# EAGLE board current_sense (EAGLE 9.6.2)
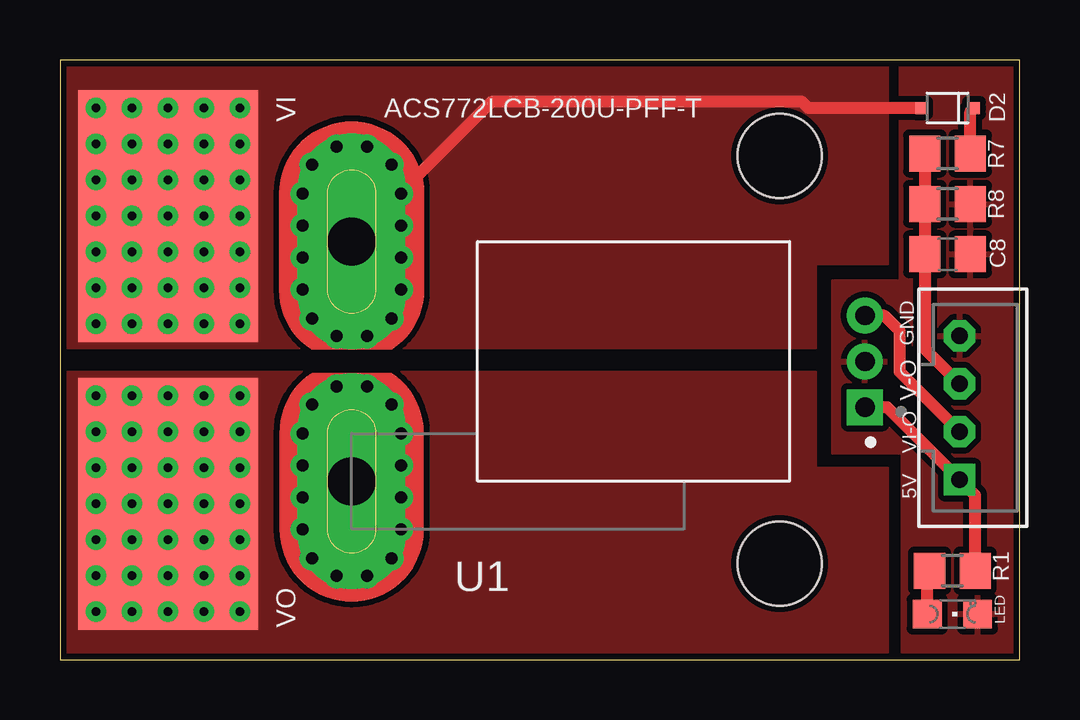
[diagram p0: board, top side]
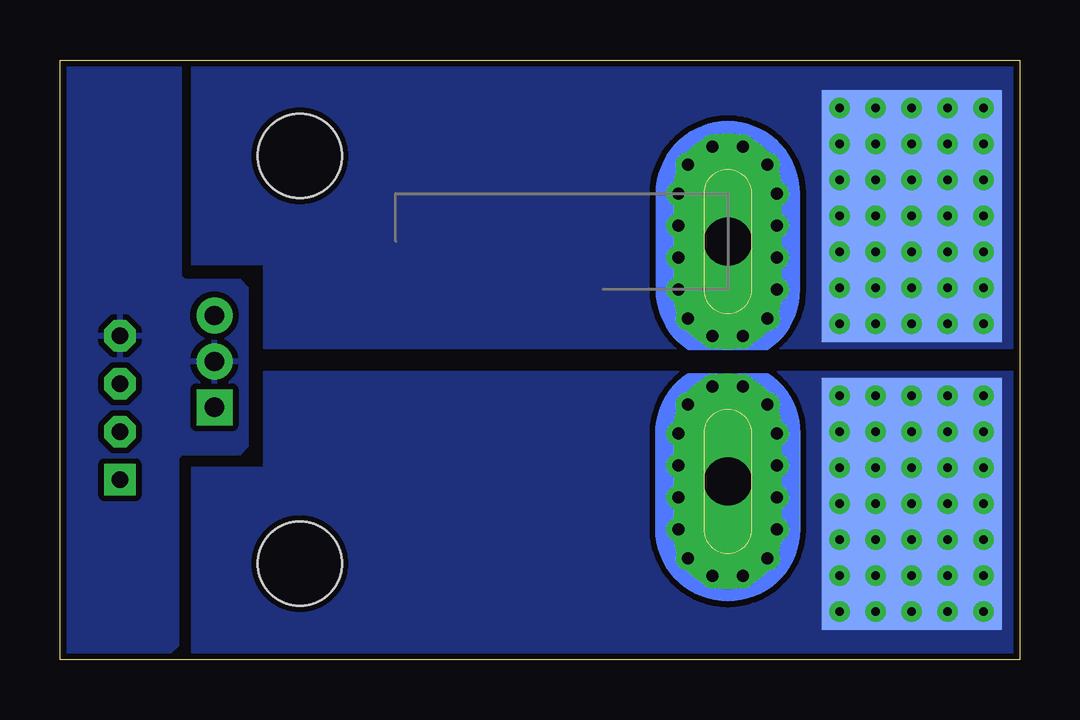
[diagram p1: board, bottom side, seen from below]

Size 40 x 25 mm. Coordinates in mm from the lower left corner, seen from the top.
Outline: 0,25 0,0 40,0 40,25 0,25
Copper layers (1*16): Top 0.035mm / dielectric 1.5mm / Bottom 0.035mm
Design rules "default *": minimum track width 0.25mm, minimum drill 0.35mm, track to track 10mil, track to pad 10mil, pad to pad 6mil, via to via 6mil, smd to smd 6mil, copper to edge 10mil, drill to drill 6mil, minimum pad ring 10mil, minimum via ring 8mil, stop-mask expansion 4mil, vias tented up to drill 0mil, thermal gap 10mil
Holes 3.5 mm at 30,21 30,4

## Footprints (pad centres in the part's own frame; a part is rotated, then mirrored left to right if it is on the bottom)
C0805 = smd 1.3 x 1.5: 1 -0.95,0; 2 0.95,0
SOD323(F) = smd 0.5 x 0.5: 1 1.1,0; 2 -1.1,0
CHIPLED_0805 = smd 1.2 x 1.2: A 0,-1.05; C 0,1.05
B4B-PH-K-S = drill 0.7 pad 1.3 square: 1 3,0 | drill 0.7 pad 1.3 octagon: 2 1,0; 3 -1,0; 4 -3,0
R0805 = smd 1.3 x 1.5: 1 -0.95,0; 2 0.95,0
XDCR_ACS772LCB-100U-PFF-T = drill 0.8 pad 1.5 square: 1 -1.91,-10.7 | drill 0.8 pad 1.5: 2 0,-10.7; 3 1.91,-10.7 | drill 2 pad 4.5 long: 4 5,10.7; 5 -5,10.7 | drill 0.5 pad 0.8: 4_1 3,8.65; 4_2 4.33,8.65; 4_3 5.66,8.65; 4_4 6.99,8.65; 4_5 8.205,9.041; 4_6 8.95,10.066; 4_7 8.95,11.333; 4_8 8.205,12.358; 4_9 6.99,12.75; 4_10 5.66,12.75; 4_11 4.33,12.75; 4_12 3,12.75; 4_13 1.795,12.358; 4_14 1.05,11.333; 4_15 1.05,10.066; 4_16 1.795,9.041; 5_1 -7,8.65; 5_2 -5.67,8.65; 5_3 -4.34,8.65; 5_4 -3.01,8.65; 5_5 -8.205,9.041; 5_6 -8.95,11.333; 5_7 -8.95,10.066; 5_8 -8.205,12.358; 5_9 -7,12.75; 5_10 -5.67,12.75; 5_11 -4.34,12.75; 5_12 -3.01,12.75; 5_13 -1.795,12.358; 5_14 -1.05,11.333; 5_15 -1.05,10.066; 5_16 -1.795,9.041
CON_PAD = smd 10.5 x 7.5: P$1 -6,0; P$2 6,0 | smd 10.5 x 7.5 bottom: P$3 -6,0; P$4 6,0 | drill 0.35: P$5 -10.5,3; P$6 -9,3; P$7 -7.5,3; P$8 -6,3; P$9 -4.5,3; P$10 -3,3; P$11 -1.5,3; P$12 -10.5,1.5; P$13 -9,1.5; P$14 -7.5,1.5; P$15 -6,1.5; P$16 -4.5,1.5; P$17 -3,1.5; P$18 -1.5,1.5; P$19 -10.5,0; P$20 -9,0; P$21 -7.5,0; P$22 -6,0; P$23 -4.5,0; P$24 -3,0; P$25 -1.5,0; P$26 -10.5,-1.5; P$27 -9,-1.5; P$28 -7.5,-1.5; P$29 -6,-1.5; P$30 -4.5,-1.5; P$31 -3,-1.5; P$32 -1.5,-1.5; P$33 -10.5,-3; P$34 -9,-3; P$35 -7.5,-3; P$36 -6,-3; P$37 -4.5,-3; P$38 -3,-3; P$39 -1.5,-3; P$40 1.5,3; P$41 3,3; P$42 4.5,3; P$43 6,3; P$44 7.5,3; P$45 9,3; P$46 10.5,3; P$47 1.5,1.5; P$48 3,1.5; P$49 4.5,1.5; P$50 6,1.5; P$51 7.5,1.5; P$52 9,1.5; P$53 10.5,1.5; P$54 1.5,0; P$55 3,0; P$56 4.5,0; P$57 6,0; P$58 7.5,0; P$59 9,0; P$60 10.5,0; P$61 1.5,-1.5; P$62 3,-1.5; P$63 4.5,-1.5; P$64 6,-1.5; P$65 7.5,-1.5; P$66 9,-1.5; P$67 10.5,-1.5; P$68 1.5,-3; P$69 3,-3; P$70 4.5,-3; P$71 6,-3; P$72 7.5,-3; P$73 9,-3; P$74 10.5,-3

## Placement (x,y rotation side)
C8  100nf  [C0805]  37,16.9 0 top
D2  1PS76SB70,115  [SOD323(F)]  37,23 0 top
LED  blue  [CHIPLED_0805]  37.2,1.9 270 top
P1  B4B-PH-KL  [B4B-PH-K-S]  37.5,10.5 270 top
R1  1k  [R0805]  37.2,3.7 0 top
R7  100k  [R0805]  37,21.1 0 top
R8  11k  [R0805]  37,19 180 top
U1  ACS772LCB-200U-PFF-T  [XDCR_ACS772LCB-100U-PFF-T]  22.86,12.43 90 top
U$1  CON_PAD  [CON_PAD]  4.5,12.5 270 top

## Library data of the parts
C8 = rcl; SPICEPREFIX: C
D2 = 1PS76SB70_115; AVAILABILITY: Good; DESCRIPTION: Diode Schottky 70V 70mA (DC) Surface Mount SOD-323; MF: Nexperia USA; MP: 1PS76SB70,115; PACKAGE: SOD323-2 Nexperia USA Inc.; PRICE: None; PURCHASE-URL: https://pricing.snapeda.com/search/part/1PS76SB70,115/?ref=eda
LED = led
P1 = con-JST PH
R1 R7 R8 = rcl; SPICEPREFIX: R
U1 = ACS772LCB-100U-PFF-T; AVAILABILITY: Bad; DESCRIPTION: Current Sensor 100A 1 Channel Hall Effect Unidirectional 5-CB Formed Leads, PFF; MF: Allegro MicroSystems LLC; MP: ACS772LCB-100U-PFF-T; PACKAGE: 5-CB-5 Allegro MicroSystems LLC; PRICE: None
U$1 = connection_pad

## Nets
5V: P1.1 R1.2 U1.1
ADC_V: C8.1 P1.3 R7.1 R8.2
GND: C8.2 LED.C P1.4 R8.1 U1.2
N$1: P1.2 U1.3
N$2: LED.A R1.1
N$9: D2.1 R7.2
VI: D2.2 U1.4 U1.4_1 U1.4_2 U1.4_3 U1.4_4 U1.4_5 U1.4_6 U1.4_7 U1.4_8 U1.4_9 U1.4_10 U1.4_11 U1.4_12 U1.4_13 U1.4_14 U1.4_15 U1.4_16 U$1.P$1 U$1.P$3 U$1.P$5 U$1.P$6 U$1.P$7 U$1.P$8 U$1.P$9 U$1.P$10 U$1.P$11 U$1.P$12 U$1.P$13 U$1.P$14 U$1.P$15 U$1.P$16 U$1.P$17 U$1.P$18 U$1.P$19 U$1.P$20 U$1.P$21 U$1.P$22 U$1.P$23 U$1.P$24 U$1.P$25 U$1.P$26 U$1.P$27 U$1.P$28 U$1.P$29 U$1.P$30 U$1.P$31 U$1.P$32 U$1.P$33 U$1.P$34 U$1.P$35 U$1.P$36 U$1.P$37 U$1.P$38 U$1.P$39
VO: U1.5 U1.5_1 U1.5_2 U1.5_3 U1.5_4 U1.5_5 U1.5_6 U1.5_7 U1.5_8 U1.5_9 U1.5_10 U1.5_11 U1.5_12 U1.5_13 U1.5_14 U1.5_15 U1.5_16 U$1.P$2 U$1.P$4 U$1.P$40 U$1.P$41 U$1.P$42 U$1.P$43 U$1.P$44 U$1.P$45 U$1.P$46 U$1.P$47 U$1.P$48 U$1.P$49 U$1.P$50 U$1.P$51 U$1.P$52 U$1.P$53 U$1.P$54 U$1.P$55 U$1.P$56 U$1.P$57 U$1.P$58 U$1.P$59 U$1.P$60 U$1.P$61 U$1.P$62 U$1.P$63 U$1.P$64 U$1.P$65 U$1.P$66 U$1.P$67 U$1.P$68 U$1.P$69 U$1.P$70 U$1.P$71 U$1.P$72 U$1.P$73 U$1.P$74

## Tracks (layer width: path | path; a pad name or v marks a point on that pad's centre or on a via)
5V
  Top 0.5: R1.2 38.15,6.85 P1.1 34.48,10.52 U1.1
ADC_V
  Top 0.5: R7.1 R8.2 C8.1 36.05,12.95 P1.3
GND
  pour Top: 35,24.7 35,15.8 32.2,15.8 32.2,8.6 35.1,8.6 35.1,0.3 40,0.3 40,24.7
  pour Bottom: 40,24.7 40,0.3 35.4,0.3 35.1,0.6 35.1,8.4 34.9,8.6 32.5,8.6 32.2,8.9 32.2,15.5 32.5,15.8 34.8,15.8 35,16 35,24.7
N$1
  Top 0.5: P1.2 35,12 35,13.7 34.36,14.34 U1.3
N$2
  Top 0.5: LED.A 36.15,3.6 R1.1
N$9
  Top 0.5: R7.2 37.95,22.85 D2.1
VI
  Top 0.5: D2.2 31.19,23 30.93,23.25 17.98,23.25 U1.4
  pour Top (no thermals): 31.5,13 0.3,13 0.3,24.7 34.5,24.7 34.5,16.5 31.5,16.5
  pour Bottom (no thermals): 0.3,24.7 0.3,13 31.5,13 31.5,16.5 34.5,16.5 34.5,24.7
VO
  pour Top (no thermals): 0,12 31.5,12 31.5,8 34.5,8 34.5,0.3 0,0.3
  pour Bottom (no thermals): 0,12 0,0.3 34.5,0.3 34.5,8 31.5,8 31.5,12

## Text on the board
tPlace: V-O
tNames: VI | ACS772LCB-200U-PFF-T | GND | VI-O | 5V | VO